# EAGLE board USB2DAC PCB (EAGLE 6.1)
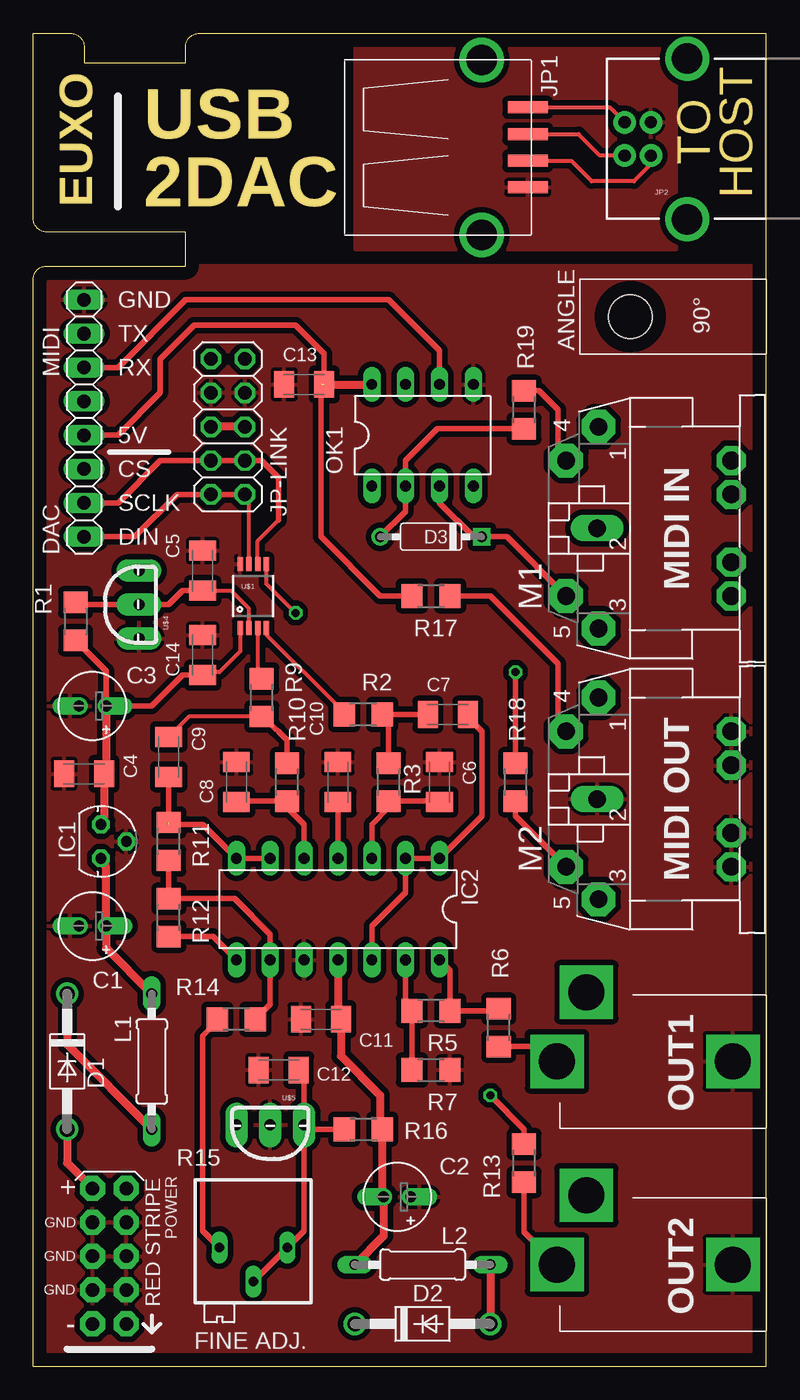
[diagram p0: board, top side]
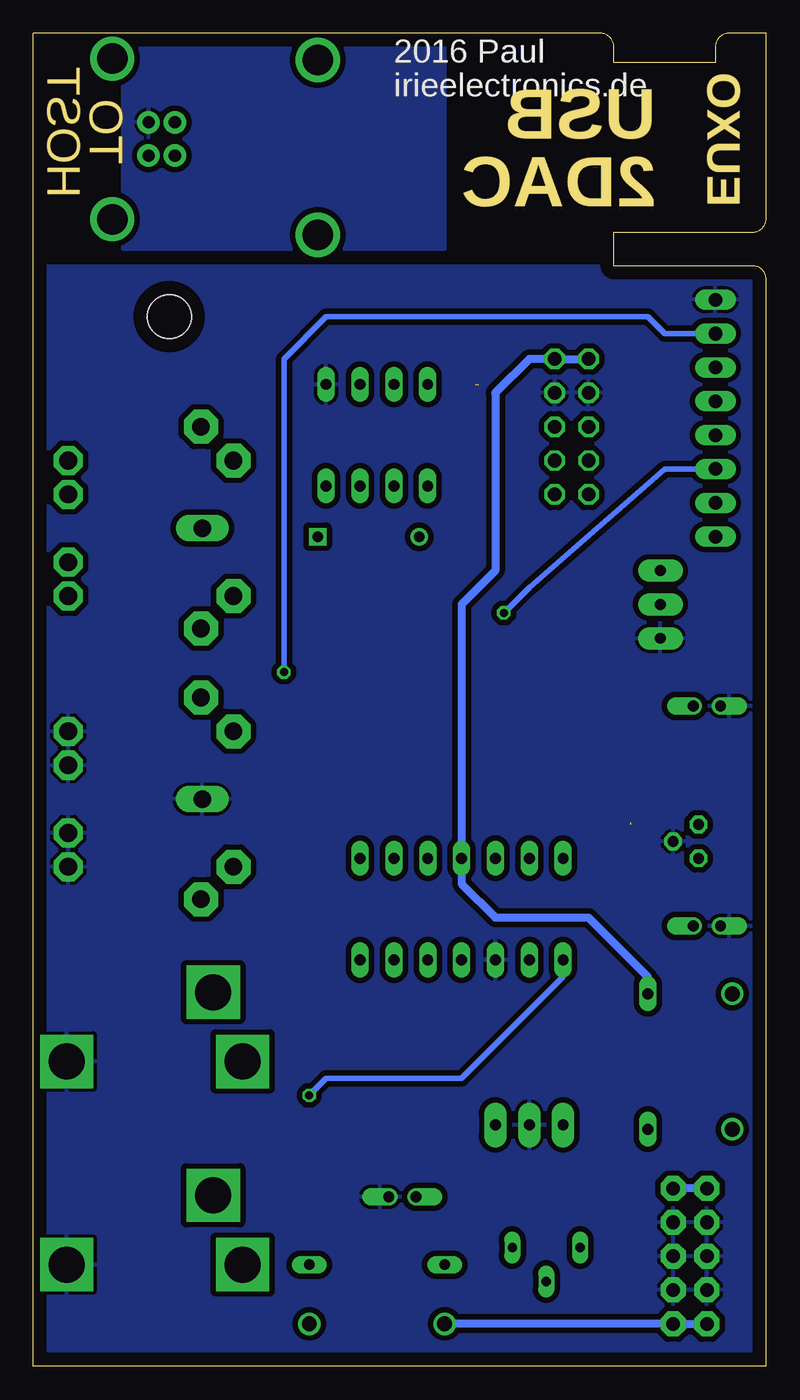
[diagram p1: board, bottom side, seen from below]

Size 55 x 100 mm. Coordinates in mm from the lower left corner, seen from the top.
Outline: 0,0 55,0 55,100 12.43,100 arc90 11.43,99 11.43,97.79 3.81,97.79 3.81,99 arc90 2.81,100 0,100 0,86.09 arc90 1,85.09 11.43,85.09 11.43,82.55 1,82.55 arc90 0,81.55 0,0
Copper layers (1*16): Top 0.035mm / dielectric 1.5mm / Bottom 0.035mm
Design rules: minimum track width 10mil, minimum drill 24mil, track to track 8mil, track to pad 8mil, pad to pad 8mil, via to via 8mil, smd to smd 8mil, copper to edge 40mil, drill to drill 8mil, minimum pad ring 10mil, minimum via ring 8mil, stop-mask expansion 4mil, vias tented up to drill 0mil, thermal gap 10mil

## Footprints (pad centres in the part's own frame; a part is rotated, then mirrored left to right if it is on the bottom)
E2-5 = drill 0.813 pad 1.27 offset: + -1.016,0; - 1.016,0
C1206K = smd 1.5 x 2: 1 -1.5,0; 2 1.5,0
DO41-10 = drill 1.118: A 5.08,0; C -5.08,0
DO35-7 = drill 0.813: A 3.81,0 | drill 0.813 square: C -3.81,0
1X03 = drill 1.016 long: 1 -2.54,0; 2 0,0; 3 2.54,0
78LXX = drill 0.813 octagon: GND 0,1.905; IN 1.27,0; OUT -1.27,0
DIL14 = drill 0.813 long: 1 -7.62,-3.81; 2 -5.08,-3.81; 3 -2.54,-3.81; 4 0,-3.81; 5 2.54,-3.81; 6 5.08,-3.81; 7 7.62,-3.81; 8 7.62,3.81; 9 5.08,3.81; 10 2.54,3.81; 11 0,3.81; 12 -2.54,3.81; 13 -5.08,3.81; 14 -7.62,3.81
USB-A-S = smd 3 x 0.9: D+ 3.45,-1; D- 3.45,1; GND 3.45,-3; VBUS 3.45,3 | drill 2.311: P$5 0,-6.566; P$6 0,6.566
USB-B-PTH = drill 0.914 pad 1.676: D+ 0,1.25; D- 1.981,1.25; GND 0,-1.25; VBUS 1.981,-1.25 | drill 2.286: S1 -2.718,-6.02; S2 -2.718,6.02
2X05 = drill 1.016 octagon: 1 -5.08,-1.27; 2 -5.08,1.27; 3 -2.54,-1.27; 4 -2.54,1.27; 5 0,-1.27; 6 0,1.27; 7 2.54,-1.27; 8 2.54,1.27; 9 5.08,-1.27; 10 5.08,1.27
0207/10 = drill 0.813 long: 1 -5.08,0; 2 5.08,0
CP-2350 = drill 1.321 pad 2.54 octagon: 1 7.62,12.58; 3 -7.52,12.58; 4 5.08,15.02; 5 -5.08,15.02 | drill 1.321 long: 2 0,12.68 | drill 1.321 pad 2.184 octagon: PE -2.54,2.62; PE1 -5.08,2.62; PE2 5.08,2.62; PE@ 2.54,2.62
1X05 = drill 1.016 long: 1 -5.08,0; 2 -2.54,0; 3 0,0; 4 2.54,0; 5 5.08,0
DIL08 = drill 0.813 long: 1 -3.81,-3.81; 2 -1.27,-3.81; 3 1.27,-3.81; 4 3.81,-3.81; 5 3.81,3.81; 6 1.27,3.81; 7 -1.27,3.81; 8 -3.81,3.81
PJ302M = drill 2.7 pad 4 square: GND 2.5,0; S 15.7,0; SW 13.5,-5.2
R1206 = smd 1.6 x 1.803: 1 -1.422,0; 2 1.422,0
RTRIM3296P = drill 0.7 long: 1 0,-2.54; 2 2.54,0; 3 0,2.54
EURO_PWR_HEADER_FAT = drill 1.016 pad 1.88 octagon: 1 -5.08,-1.27; 2 -5.08,1.27; 3 -2.54,-1.27; 4 -2.54,1.27; 5 0,-1.27; 6 0,1.27; 7 2.54,-1.27; 8 2.54,1.27; 9 5.08,-1.27; 10 5.08,1.27
MSOP-8 = smd 0.41 x 1.02: 1 -0.975,-2.4; 2 -0.325,-2.4; 3 0.325,-2.4; 4 0.975,-2.4; 5 0.975,2.4; 6 0.325,2.4; 7 -0.325,2.4; 8 -0.975,2.4
WINKEL90° = hole 3.3: 10.2,0
TO-92 = drill 0.813 pad 1.676 long: + 0,0.318; - -2.54,0.318; NC 2.54,0.318

## Placement (x,y rotation side)
C1  47uF  [E2-5]  4.45,33.02 180 top
C2  47uF  [E2-5]  27.3,12.7 180 top
C3  22uF  [E2-5]  4.45,49.53 180 top
C4  100nF  [C1206K]  3.81,44.45 180 top
C5  100nF  [C1206K]  12.7,59.69 90 top
C6  [C1206K]  30.48,43.81 90 top
C7  [C1206K]  31.11,48.9 0 top
C8  [C1206K]  15.24,43.81 90 top
C9  [C1206K]  10.16,45.72 270 top
C10  [C1206K]  22.86,43.81 90 top
C11  [C1206K]  21.59,26.04 0 top
C12  100nF  [C1206K]  18.41,22.23 180 top
C13  [C1206K]  20.32,73.66 180 top
C14  [C1206K]  12.7,53.34 270 top
D1  1N4004  [DO41-10]  2.54,22.86 270 top
D2  1N4004  [DO41-10]  29.21,3.17 0 top
D3  [DO35-7]  29.84,62.23 180 top
DAC  [1X03]  3.81,64.77 90 top
IC1  [78LXX]  5.08,39.37 270 top
IC2  TL074P  [DIL14]  22.86,34.29 180 top
JP1  USB-A-S  [USB-A-S]  33.66,91.44 0 top
JP2  USB-B  [USB-B-PTH]  46.35,92.08 180 top
JP-LINK  [2X05]  14.61,70.48 270 top
L1  [0207/10]  8.89,22.86 90 top
L2  [0207/10]  29.21,7.62 180 top
M1  MIDI-IN  [CP-2350]  55,62.87 90 top
M2  MIDI-OUT  [CP-2350]  55,42.55 90 top
MIDI  [1X05]  3.81,74.93 270 top
OK1  6N137  [DIL08]  29.21,69.85 0 top
OUT1  PJ302M  [PJ302M]  55,22.86 180 top
OUT2  PJ302M  [PJ302M]  55,7.62 180 top
R1  [R1206]  3.17,55.88 90 top
R2  [R1206]  24.77,48.9 0 top
R3  [R1206]  26.67,43.81 270 top
R5  [R1206]  29.84,26.67 0 top
R6  [R1206]  34.92,25.4 270 top
R7  [R1206]  29.84,22.23 180 top
R9  [R1206]  17.14,50.16 270 top
R10  [R1206]  19.05,43.81 270 top
R11  [R1206]  10.16,39.37 270 top
R12  [R1206]  10.16,33.66 270 top
R13  [R1206]  36.83,15.24 270 top
R14  [R1206]  15.24,26.04 0 top
R15  [RTRIM3296P]  16.51,8.89 270 top
R16  [R1206]  24.77,17.78 180 top
R17  [R1206]  29.84,57.78 180 top
R18  [R1206]  36.2,43.81 270 top
R19  [R1206]  36.83,71.75 270 top
SV1  EURO_POWER_HEADERFAT_PADS  [EURO_PWR_HEADER_FAT]  5.71,8.26 90 top
U$1  DAC8552  [MSOP-8]  16.51,57.78 0 top
U$2  WINKEL  [WINKEL90°]  55,78.74 180 top
U$4  LM4040DIP  [TO-92]  8.26,57.15 90 top
U$5  LM4040DIP  [TO-92]  17.78,18.41 180 top

## Library data of the parts
C1-C14 L1 L2 R1-R3 R5-R7 R9-R19 = resistor-mod
D1 D2 = diode
D3 = MusicThingModular
DAC JP-LINK MIDI = pinhead 2
IC1 = v-reg
IC2 = linear
JP1 = SparkFun-Connectors
JP2 = SparkFun-Connectors; PROD_ID: CONN-08278
M1 M2 = adafruit
OK1 = optocoupler; MPN: 6N137; OC_FARNELL: 1328376; OC_NEWARK: 52M1895
OUT1 OUT2 = PJ203M 3.5mm
SV1 = MusicThingModular mod
U$1 = og-dac
U$2 = winkel
U$4 U$5 = GuShH

## Nets
+3V3: C3.+ C4.1 C14.2 IC1.OUT R1.1 U$1.1
+5V: C13.1 MIDI.5 OK1.8 R17.2
+12V: C1.+ C10.1 IC1.IN IC2.4 JP-LINK.1 JP-LINK.2 L1.2
-12V: C2.- C11.2 IC2.11 L2.2 R16.1
GND: C1.- C2.+ C3.- C4.2 C5.2 C6.2 C8.2 C10.2 C11.1 C12.2 C13.2 C14.1 IC1.GND IC2.10 JP-LINK.3 JP-LINK.4 M2.2 M2.PE M2.PE1 M2.PE2 M2.PE@ MIDI.1 OK1.5 OUT1.GND OUT2.GND R7.1 SV1.3 SV1.4 SV1.5 SV1.6 SV1.7 SV1.8 U$1.8 U$4.- U$5.+
N$1: DAC.3 U$1.5
N$2: DAC.2 JP-LINK.7 JP-LINK.8 U$1.6
N$3: DAC.1 JP-LINK.9 JP-LINK.10 U$1.7
N$5: D3.A OK1.2 R19.2
N$6: M2.5 R18.2
N$7: D2.C SV1.1 SV1.2
N$8: D1.A SV1.9 SV1.10
N$10: C6.1 IC2.3 R3.2
N$11: C7.1 R2.2 R3.1
N$12: IC2.13 R5.1 R7.2
N$13: IC2.14 R5.2 R6.1
N$15: C9.2 IC2.6 IC2.7 R11.1
N$16: C8.1 IC2.5 R10.2
N$17: C9.1 R9.2 R10.1
N$18: IC2.9 R11.2 R12.1 R14.2
N$19: IC2.8 R12.2 R13.1
N$20: R14.1 R15.1
N$21: D2.A L2.1
N$22: D1.C L1.1
N$24: JP1.VBUS JP2.VBUS
N$25: JP1.D- JP2.D-
N$26: JP1.D+ JP2.D+
N$27: M2.4 R17.1
N$28: M1.4 R19.1
N$29: JP-LINK.5 JP-LINK.6
N$30: D3.C M1.5 OK1.3
N$31: C7.2 IC2.1 IC2.2 IC2.12
OUT1: OUT1.S R6.2
OUT2: OUT2.S R13.2
OUTA: R2.1 U$1.4
OUTB: R9.1 U$1.3
RX: MIDI.3 OK1.6
TX: MIDI.2 R18.1
USB_GND: JP1.GND JP2.GND
VREF2.5: C5.1 R1.2 U$1.2 U$4.+
VREF-10: C12.1 R15.2 R15.3 R16.2 U$5.-

## Tracks (layer width: path | path; a pad name or v marks a point on that pad's centre or on a via)
+3V3
  Top 0.305: U$1.1 15.54,53.63 13.97,52.07 12.93,52.07 C14.2
  Top 0.406: 12.7,52.07 C14.2 11.2,51.84 8.89,49.53 C3.+ 5.46,52.17 R1.1
  Top 0.61: IC1.OUT arc45 5.31,41.2 C4.1 arc45 5.46,44.81 C3.+
+5V  (1 unrouted)
  Top 0.406: C13.1 21.82,75.97 19.68,78.11 12.06,78.11 9.53,75.56 9.53,73.03 6.35,69.85 MIDI.5 | R17.2 26.04,57.78 21.59,62.23 21.59,73.66
  Top 0.61: C13.1 OK1.8
+12V
  Top 0.406: C10.1 IC2.4
  Top 0.61: IC1.IN 5.17,38.01 arc-45 5.46,37.3 C1.+ 5.46,31.37 L1.2
  Bottom 0.61: JP-LINK.1 JP-LINK.2 17.78,75.56 20.32,73.03 20.32,59.69 22.86,57.15 IC2.4 22.86,36.2 20.32,33.66 13.34,33.66 8.89,29.21 L1.2
-12V
  Top 0.61: IC2.11 22.86,26.27 C11.2 23.09,23.27 26.04,20.32 26.04,17.93 R16.1 26.19,12.8 C2.- 26.29,9.78 L2.2
GND
  pour Top (isolate 0.406): 0,82.55 0,0 54.61,0 54.61,82.55
  pour Bottom (isolate 0.406): 0,82.55 0,0 54.61,0 54.61,82.55
N$1  (via drill 0.6 pad 0.41)
  Top 0.305: U$1.5 17.48,58.72 v19.68,56.52
  Bottom 0.406: DAC.3 7.62,67.31 17.78,58.42 v19.68,56.52
N$2
  Top 0.305: U$1.6 16.84,61.92 18.41,63.5
  Top 0.406: DAC.2 6.35,64.77 9.53,67.94 JP-LINK.7 JP-LINK.8 17.14,67.94 18.41,66.67 18.41,63.5
N$3
  Top 0.305: U$1.7 16.18,65.09 JP-LINK.10
  Top 0.406: JP-LINK.10 JP-LINK.9 10.79,65.41 7.62,62.23 DAC.1
N$5
  Top 0.406: D3.A 27.94,64.14 OK1.2 27.94,67.94 30.33,70.33 R19.2
N$6
  Top 0.406: M2.5 39.98,37.49 36.2,41.27 R18.2
N$7
  Bottom 0.61: SV1.2 SV1.1 D2.C
N$8
  Top 0.61: D1.A 2.54,15.24 SV1.10
  Bottom 0.61: SV1.10 SV1.9
N$10
  Top 0.406: C6.1 29.77,42.39 R3.2 26.67,41.91 25.4,40.64 IC2.3
N$11
  Top 0.406: C7.1 26.67,48.9 | 26.67,48.9 R3.1 | 26.67,48.9 R2.2
N$12
  Top 0.406: IC2.13 27.94,26.67 28.42,26.19 R5.1 R7.2
N$13
  Top 0.406: IC2.14 31.27,29.69 R5.2 34.77,26.67 R6.1
N$15  (1 unrouted)
  Top 0.406: IC2.6 IC2.7 12.7,40.64 10.16,40.64 C9.2
N$16
  Top 0.406: IC2.5 20.32,40.64 19.05,41.91 R10.2 15.32,42.39 C8.1
N$17
  Top 0.305: R9.2 11.68,48.74 C9.1
  Top 0.406: R9.2 18.41,47.62 19.05,46.99 R10.1
N$18
  Top 0.406: R11.2 R12.1 15.09,35.08 17.78,32.38 IC2.9 17.78,27.15 R14.2
N$19  (via drill 0.6 pad 0.41)
  Top 0.406: R12.2 13.49,32.23 IC2.8 | R13.1 36.83,17.78 v34.29,20.32
  Bottom 0.406: IC2.8 15.24,29.21 22.86,21.59 33.02,21.59 v34.29,20.32
N$20
  Top 0.406: R14.1 13.82,25.88 12.7,24.77 12.7,10.16 R15.1
N$21
  Top 0.61: L2.1 D2.A
N$22
  Top 0.61: D1.C 2.54,24.13 L1.1
N$24
  Top 0.305: JP1.VBUS 43.26,94.44 JP2.VBUS
N$25
  Top 0.305: JP1.D- 40.91,92.44 42.52,90.83 JP2.D-
N$26
  Top 0.305: JP1.D+ 40.37,90.44 41.91,88.9 45.09,88.9 46.35,90.17 JP2.D+
N$27
  Top 0.406: R17.1 34.29,57.78 39.37,52.7 39.37,48.23 M2.4
N$28
  Top 0.406: R19.1 37.95,73.18 39.37,71.75 39.37,68.58 40.01,67.94 M1.4
N$29
  Top 0.61: JP-LINK.6 JP-LINK.5
N$30
  Top 0.406: OK1.3 30.48,64.77 33.02,62.23 D3.C 35.53,62.23 M1.5
N$31
  Top 0.406: IC2.1 IC2.2 27.94,35.56 25.4,33.02 IC2.12 | 30.63,38.25 IC2.1 | C7.2 32.62,48.66 33.66,47.62 33.66,41.27 IC2.1
OUT1
  Top 0.406: R6.2 38.25,23.98 39.37,22.86 OUT1.S
OUT2
  Top 0.406: R13.2 36.83,10.09 OUT2.S
OUTA
  Top 0.305: U$1.4 17.48,54.91 22.86,49.53 22.86,49.38 R2.1
OUTB
  Top 0.305: U$1.3 16.84,51.9 R9.1
RX
  Top 0.406: OK1.6 30.48,76.2 26.67,80.01 11.43,80.01 6.35,74.93 MIDI.3
TX  (via drill 0.6 pad 1.02)
  Top 0.406: v36.2,52.07 R18.1
  Bottom 0.406: v36.2,52.07 36.2,75.56 33.02,78.74 8.89,78.74 7.62,77.47 MIDI.2
USB_GND
  pour Top (isolate 0.406): 24.13,100.33 24.13,83.82 48.26,83.82 48.26,100.33
  pour Bottom (isolate 0.406): 24.13,100.33 24.13,83.82 48.26,83.82 48.26,100.33
VREF2.5
  Top 0.305: U$1.2 16.18,56.84 14.84,58.19 C5.1
  Top 0.406: R1.2 2.69,57.3 2.54,57.15 U$4.+ 10.16,57.15 11.2,58.19 C5.1
VREF-10
  Top 0.406: R15.2 R15.3 20.32,10.16 U$5.- | R16.2 20.64,17.78 U$5.- | U$5.- 20.32,21.82 C12.1

## Text on the board
Dimension: USB | TO | HOST | EUXO | 2DAC
tPlace: GND | TX | RX | 5V | CS | SCLK | DIN
tNames: 90° | ANGLE | MIDI IN | MIDI OUT | FINE ADJ.
bNames: 2016 Paul | irieelectronics.de